# Altium PCB pcb.pcbdoc (part 3 of 6)
Units mm, origin at the board's own origin, x right, y up, seen from the top; angles counter-clockwise.
Board outline 95 x 60 mm, 4 copper layers (Top Layer, TopInt Layer, BotInt Layer, Bottom Layer), stack 1.459 mm thick; 162 components, 164 nets, 673 pads, 269 vias.
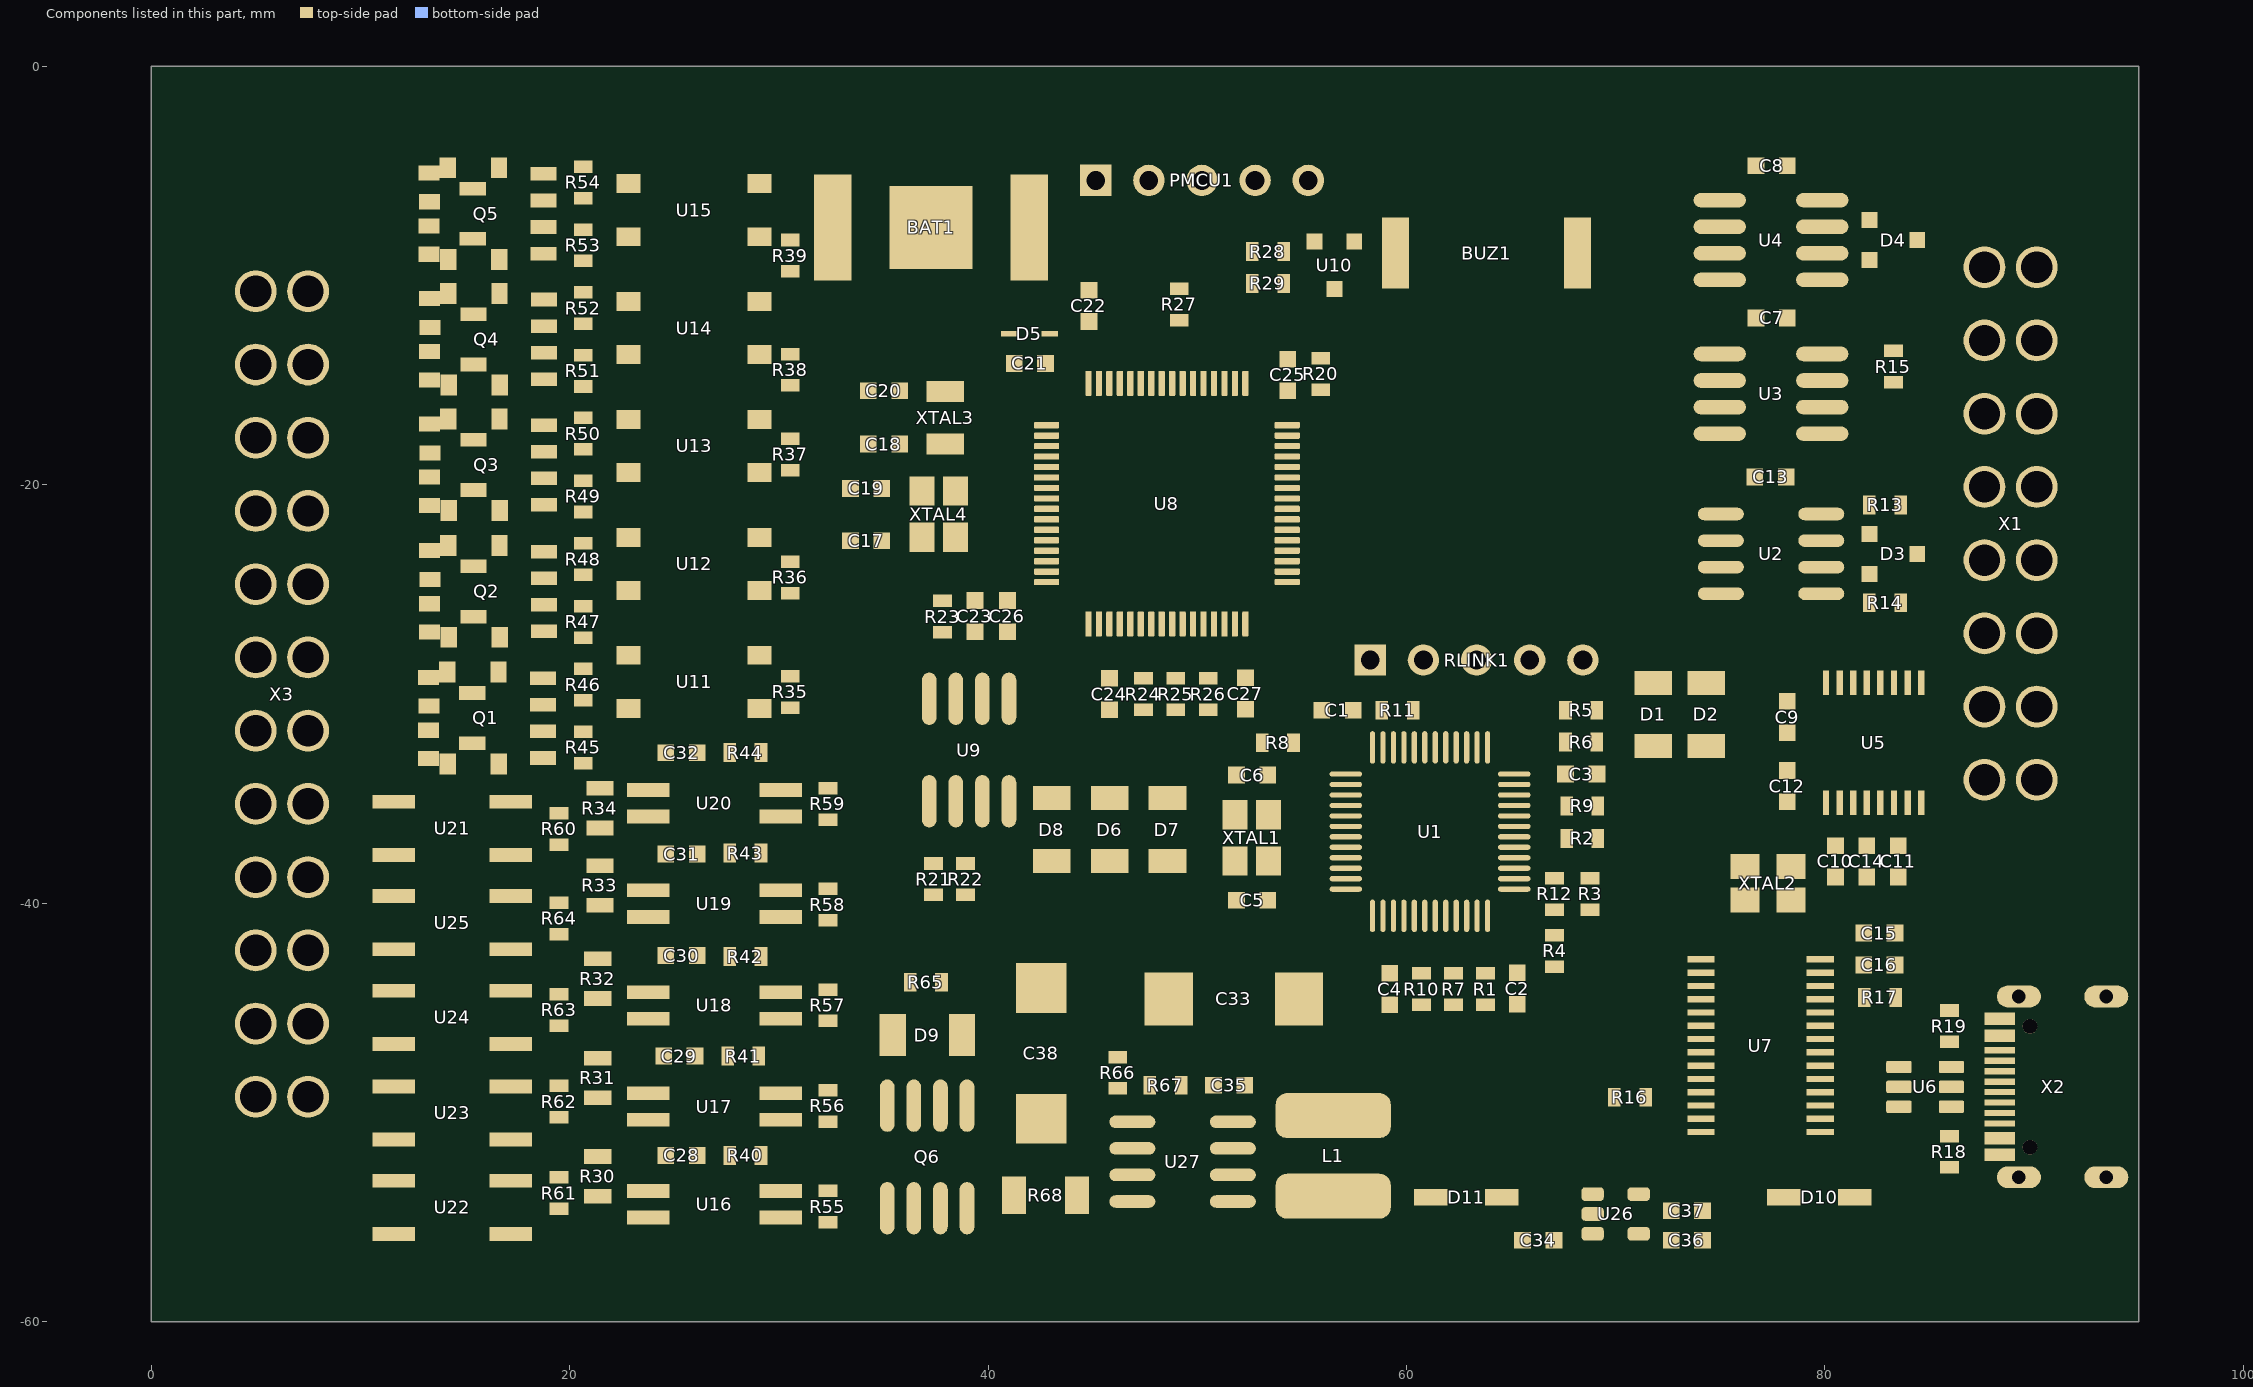
[diagram p5: the components of this part, seen from the top]

## Via types
v1: diameter 0.7, hole 0.3, Top Layer to Bottom Layer, tented both sides, 249 vias
v2: diameter 1, hole 0.5, Top Layer to Bottom Layer, tented both sides, 20 vias

## Nets (pads, with @x,y where several pads share a name; then routed paths per layer and width w, separated by ;. In a path a pad name is that pad's centre, name@x,y a point inside that pad or via, vN(x,y) a via of type N, cw(c..) or ccw(c..) an arc to the next point about the centre after c; other vN are vias at no path point) (continued)
copper on no net: (continued)
  Top Layer w0.025: 62.543,-20.277 62.746,-20.277 ; 62.543,-20.252 62.721,-20.252 ; 62.543,-20.227 62.721,-20.227 ; 62.543,-20.201 62.721,-20.201 ; 62.543,-20.176 62.696,-20.176 ; 62.569,-20.328 62.772,-20.328 ; 62.569,-20.303 62.746,-20.303 ; 62.569,-19.617 62.746,-19.617 ; 62.569,-19.592 62.746,-19.592 ; 62.569,-19.566 62.746,-19.566 ; 62.569,-19.541 62.746,-19.541 ; 62.569,-19.515 62.746,-19.515 ; 62.594,-20.379 62.848,-20.379 ; 62.594,-20.354 62.823,-20.354 ; 62.594,-19.719 62.848,-19.719 ; 62.594,-19.693 62.797,-19.693 ; 62.594,-19.668 62.772,-19.668 ; 62.594,-19.642 62.772,-19.642 ; 62.594,-19.49 62.772,-19.49 ; 62.594,-19.465 62.772,-19.465 ; 62.594,-19.439 62.797,-19.439 ; 62.594,-18.474 62.772,-18.474 ; 62.594,-18.449 62.772,-18.449 ; 62.594,-18.423 62.772,-18.423 ; 62.594,-18.398 62.772,-18.398 ; 62.594,-18.372 62.772,-18.372 ; 62.594,-18.347 62.772,-18.347 ; 62.594,-18.322 62.772,-18.322 ; 62.594,-18.296 62.772,-18.296 ; 62.594,-18.271 62.772,-18.271 ; 62.594,-18.245 62.772,-18.245 ; 62.594,-18.22 62.772,-18.22 ; 62.594,-18.195 62.772,-18.195 ; 62.594,-18.169 62.772,-18.169 ; 62.594,-18.144 62.772,-18.144 ; 62.594,-18.118 62.772,-18.118 ; 62.594,-18.093 62.772,-18.093 ; 62.594,-18.068 62.772,-18.068 ; 62.594,-18.042 62.772,-18.042 ; 62.594,-18.017 62.772,-18.017 ; 62.594,-17.991 62.772,-17.991 ; 62.594,-17.966 62.772,-17.966 ; 62.594,-17.941 62.772,-17.941 ; 62.594,-17.915 62.772,-17.915 ; 62.594,-17.89 62.772,-17.89 ; 62.594,-17.864 62.772,-17.864 ; 62.594,-17.839 62.772,-17.839 ; 62.594,-17.814 62.772,-17.814 ; 62.594,-17.788 62.772,-17.788 ; 62.594,-17.763 62.772,-17.763 ; 62.594,-17.737 62.772,-17.737 ; 62.594,-17.712 62.772,-17.712 ; 62.594,-17.687 62.772,-17.687 ; 62.594,-17.661 62.772,-17.661 ; 62.594,-17.636 62.772,-17.636 ; 62.594,-17.61 62.772,-17.61 ; 62.594,-17.585 62.772,-17.585 ; 62.594,-17.56 62.797,-17.56 ; 62.594,-17.534 62.797,-17.534 ; 62.594,-17.509 62.823,-17.509 ; 62.594,-17.483 62.848,-17.483 ; 62.594,-17.458 62.848,-17.458 ; 62.594,-17.433 62.873,-17.433 ; 62.594,-17.407 62.899,-17.407 ; 62.594,-17.382 62.95,-17.382 ; 62.594,-17.356 62.975,-17.356 ; 62.594,-17.331 62.772,-17.331 ; 62.594,-17.306 62.772,-17.306 ; 62.594,-17.28 62.772,-17.28 ; 62.594,-17.255 62.772,-17.255 ; 62.594,-17.229 62.772,-17.229 ; 62.594,-17.204 62.772,-17.204 ; 62.594,-17.179 62.772,-17.179 ; 62.594,-17.153 62.772,-17.153 ; 62.594,-17.128 62.772,-17.128 ; 62.594,-17.102 62.772,-17.102 ; 62.594,-17.077 62.772,-17.077 ; 62.594,-17.052 62.772,-17.052 ; 62.594,-17.026 62.772,-17.026 ; 62.594,-17.001 62.772,-17.001 ; 62.594,-16.975 62.772,-16.975 ; 62.594,-16.95 62.772,-16.95 ; 62.594,-16.925 62.772,-16.925 ; 62.594,-16.899 62.772,-16.899 ; 62.594,-16.874 62.772,-16.874 ; 62.594,-16.848 62.772,-16.848 ; 62.594,-16.823 62.772,-16.823 ; 62.594,-16.798 62.772,-16.798 ; 62.594,-16.772 62.772,-16.772 ; 62.594,-16.747 62.772,-16.747 ; 62.594,-16.721 62.772,-16.721 ; 62.594,-16.696 62.772,-16.696 ; 62.594,-16.671 62.772,-16.671 ; 62.594,-16.239 62.772,-16.239 ; 62.594,-16.213 62.772,-16.213 ; 62.594,-16.188 62.772,-16.188 ; 62.594,-16.163 62.772,-16.163 ; 62.594,-16.137 62.772,-16.137 ; 62.594,-16.112 62.772,-16.112 ; 62.594,-16.086 62.772,-16.086 ; 62.594,-16.061 62.772,-16.061 ; 62.594,-16.036 62.772,-16.036 ; 62.594,-16.01 62.772,-16.01 ; 62.594,-15.985 62.772,-15.985 ; 62.594,-15.959 62.772,-15.959 ; 62.594,-15.934 62.772,-15.934 ; 62.594,-15.909 62.772,-15.909 ; 62.594,-15.883 62.772,-15.883 ; 62.594,-15.858 62.772,-15.858 ; 62.594,-15.832 62.772,-15.832 ; 62.594,-15.807 62.772,-15.807 ; 62.594,-15.782 62.772,-15.782 ; 62.594,-15.756 62.772,-15.756 ; 62.594,-15.731 62.772,-15.731 ; 62.594,-15.705 62.772,-15.705 ; 62.594,-15.68 62.772,-15.68 ; 62.594,-15.655 62.772,-15.655 ; 62.594,-15.629 62.772,-15.629 ; 62.594,-15.604 62.772,-15.604 ; 62.594,-15.578 62.772,-15.578 ; 62.594,-15.553 62.772,-15.553 ; 62.594,-15.528 62.772,-15.528 ; 62.594,-15.502 62.772,-15.502 ; 62.594,-15.477 62.772,-15.477 ; 62.594,-15.451 62.772,-15.451 ; 62.594,-15.426 62.772,-15.426 ; 62.594,-15.401 62.772,-15.401 ; 62.594,-15.375 62.772,-15.375 ; 62.594,-15.35 62.772,-15.35 ; 62.594,-15.324 62.772,-15.324 ; 62.594,-15.299 62.797,-15.299 ; 62.594,-15.274 62.797,-15.274 ; 62.594,-15.248 62.823,-15.248 ; 62.594,-15.223 62.823,-15.223 ; 62.594,-15.197 62.848,-15.197 ; 62.594,-15.172 62.873,-15.172 ; 62.594,-15.147 62.899,-15.147 ; 62.594,-15.121 62.95,-15.121 ; 62.594,-15.096 63,-15.096 ; 62.594,-15.07 62.772,-15.07 ; 62.594,-15.045 62.772,-15.045 ; 62.594,-15.02 62.772,-15.02 ; 62.594,-14.994 62.772,-14.994 ; 62.594,-14.969 62.772,-14.969 ; 62.594,-14.943 62.772,-14.943 ; 62.619,-20.404 62.924,-20.404 ; 62.619,-19.744 62.899,-19.744 ; 62.619,-19.414 62.848,-19.414 ; 62.619,-19.388 62.873,-19.388 ; 62.645,-20.43 63.432,-20.43 ; 62.645,-19.769 62.95,-19.769 ; 62.645,-19.363 62.975,-19.363 ; 62.67,-20.455 63.407,-20.455 ; 62.67,-19.795 63.051,-19.795 ; 62.67,-19.338 63.432,-19.338 ; 62.696,-19.82 63.153,-19.82 ; 62.696,-19.312 63.381,-19.312 ; 62.721,-20.481 63.381,-20.481 ; 62.721,-19.846 63.229,-19.846 ; 62.746,-20.506 63.331,-20.506 ; 62.746,-19.287 63.356,-19.287 ; 62.772,-19.871 63.305,-19.871 ; 62.772,-19.261 63.305,-19.261 ; 62.797,-17.331 63.051,-17.331 ; 62.797,-15.07 63.229,-15.07 ; 62.797,-15.045 63.229,-15.045 ; 62.823,-20.531 63.28,-20.531 ; 62.823,-17.306 63.508,-17.306 ; 62.823,-15.02 63.229,-15.02 ; 62.848,-19.896 63.356,-19.896 ; 62.848,-19.236 63.229,-19.236 ; 62.848,-17.28 63.483,-17.28 ; 62.848,-14.994 63.229,-14.994 ; 62.873,-17.255 63.458,-17.255 ; 62.899,-14.969 63.229,-14.969 ; 62.924,-20.557 63.153,-20.557 ; 62.924,-19.922 63.407,-19.922 ; 62.924,-17.229 63.432,-17.229 ; 62.95,-14.943 63.229,-14.943 ; 62.975,-17.204 63.381,-17.204 ; 63.026,-19.947 63.432,-19.947 ; 63.051,-17.179 63.305,-17.179 ; 63.051,-14.918 63.153,-14.918 ; 63.102,-19.363 63.432,-19.363 ; 63.127,-19.973 63.458,-19.973 ; 63.153,-20.404 63.458,-20.404 ; 63.204,-19.998 63.483,-19.998 ; 63.204,-19.388 63.458,-19.388 ; 63.229,-20.379 63.483,-20.379 ; 63.229,-19.414 63.483,-19.414 ; 63.229,-17.331 63.534,-17.331 ; 63.254,-20.023 63.483,-20.023 ; 63.28,-20.354 63.508,-20.354 ; 63.28,-20.049 63.508,-20.049 ; 63.28,-19.439 63.483,-19.439 ; 63.305,-20.328 63.508,-20.328 ; 63.305,-20.074 63.508,-20.074 ; 63.305,-19.465 63.508,-19.465 ; 63.305,-17.356 63.534,-17.356 ; 63.305,-15.705 63.483,-15.705 ; 63.305,-15.68 63.483,-15.68 ; 63.305,-15.655 63.483,-15.655 ; 63.305,-15.629 63.483,-15.629 ; 63.305,-15.604 63.483,-15.604 ; 63.305,-15.578 63.483,-15.578 ; 63.305,-15.553 63.483,-15.553 ; 63.305,-15.528 63.483,-15.528 ; 63.305,-15.502 63.483,-15.502 ; 63.305,-15.477 63.483,-15.477 ; 63.331,-20.303 63.508,-20.303 ; 63.331,-20.1 63.534,-20.1 ; 63.331,-19.515 63.508,-19.515 ; 63.331,-19.49 63.508,-19.49 ; 63.331,-17.382 63.559,-17.382 ; 63.331,-15.832 63.508,-15.832 ; 63.331,-15.807 63.508,-15.807 ; 63.331,-15.782 63.508,-15.782 ; 63.331,-15.756 63.508,-15.756 ; 63.331,-15.731 63.483,-15.731 ; 63.331,-15.451 63.483,-15.451 ; 63.331,-15.426 63.508,-15.426 ; 63.331,-15.401 63.508,-15.401 ; 63.331,-15.375 63.508,-15.375 ; 63.331,-15.35 63.508,-15.35 ; 63.356,-20.277 63.534,-20.277 ; 63.356,-20.252 63.534,-20.252 ; 63.356,-20.227 63.534,-20.227 ; 63.356,-20.201 63.534,-20.201 ; 63.356,-20.176 63.534,-20.176 ; 63.356,-20.15 63.534,-20.15 ; 63.356,-20.125 63.534,-20.125 ; 63.356,-19.617 63.534,-19.617 ; 63.356,-19.592 63.534,-19.592 ; 63.356,-19.566 63.534,-19.566 ; 63.356,-19.541 63.534,-19.541 ; 63.356,-17.407 63.559,-17.407 ; 63.356,-15.909 63.559,-15.909 ; 63.356,-15.883 63.534,-15.883 ; 63.356,-15.858 63.534,-15.858 ; 63.356,-15.324 63.534,-15.324 ; 63.356,-15.299 63.534,-15.299 ; 63.356,-15.274 63.559,-15.274 ; 63.381,-17.458 63.559,-17.458 ; 63.381,-17.433 63.559,-17.433 ; 63.381,-15.959 63.585,-15.959 ; 63.381,-15.934 63.559,-15.934 ; 63.381,-15.248 63.585,-15.248 ; 63.381,-15.223 63.585,-15.223 ; 63.407,-17.56 63.585,-17.56 ; 63.407,-17.534 63.585,-17.534 ; 63.407,-17.509 63.585,-17.509 ; 63.407,-17.483 63.585,-17.483 ; 63.407,-16.01 63.635,-16.01 ; 63.407,-15.985 63.61,-15.985 ; 63.407,-15.197 63.61,-15.197 ; 63.407,-15.172 63.635,-15.172 ; 63.432,-18.474 63.585,-18.474 ; 63.432,-18.449 63.585,-18.449 ; 63.432,-18.423 63.585,-18.423 ; 63.432,-18.398 63.585,-18.398 ; 63.432,-18.372 63.585,-18.372 ; 63.432,-18.347 63.585,-18.347 ; 63.432,-18.322 63.585,-18.322 ; 63.432,-18.296 63.585,-18.296 ; 63.432,-18.271 63.585,-18.271 ; 63.432,-18.245 63.585,-18.245 ; 63.432,-18.22 63.585,-18.22 ; 63.432,-18.195 63.585,-18.195 ; 63.432,-18.169 63.585,-18.169 ; 63.432,-18.144 63.585,-18.144 ; 63.432,-18.118 63.585,-18.118 ; 63.432,-18.093 63.585,-18.093 ; 63.432,-18.068 63.585,-18.068 ; 63.432,-18.042 63.585,-18.042 ; 63.432,-18.017 63.585,-18.017 ; 63.432,-17.991 63.585,-17.991 ; 63.432,-17.966 63.585,-17.966 ; 63.432,-17.941 63.585,-17.941 ; 63.432,-17.915 63.585,-17.915 ; 63.432,-17.89 63.585,-17.89 ; 63.432,-17.864 63.585,-17.864 ; 63.432,-17.839 63.585,-17.839 ; 63.432,-17.814 63.585,-17.814 ; 63.432,-17.788 63.585,-17.788 ; 63.432,-17.763 63.585,-17.763 ; 63.432,-17.737 63.585,-17.737 ; 63.432,-17.712 63.585,-17.712 ; 63.432,-17.687 63.585,-17.687 ; 63.432,-17.661 63.585,-17.661 ; 63.432,-17.636 63.585,-17.636 ; 63.432,-17.61 63.585,-17.61 ; 63.432,-17.585 63.585,-17.585 ; 63.432,-16.036 63.661,-16.036 ; 63.432,-15.147 63.661,-15.147 ; 63.458,-16.086 63.737,-16.086 ; 63.458,-16.061 63.686,-16.061 ; 63.458,-15.121 63.686,-15.121 ; 63.483,-16.112 63.813,-16.112 ; 63.483,-15.096 63.737,-15.096 ; 63.508,-16.137 64.27,-16.137 ; 63.508,-15.07 63.813,-15.07 ; 63.534,-15.045 64.27,-15.045 ; 63.559,-16.163 64.245,-16.163 ; 63.559,-15.02 64.245,-15.02 ; 63.585,-16.188 64.194,-16.188 ; 63.585,-14.994 64.194,-14.994 ; 63.635,-16.213 64.169,-16.213 ; 63.635,-14.969 64.143,-14.969 ; 63.686,-16.239 64.093,-16.239 ; 63.712,-14.943 64.093,-14.943 ; 63.737,-19.947 63.915,-19.947 ; 63.737,-19.922 63.915,-19.922 ; 63.737,-19.896 63.915,-19.896 ; 63.737,-19.871 63.915,-19.871 ; 63.737,-19.846 63.915,-19.846 ; 63.737,-19.82 63.915,-19.82 ; 63.762,-20.125 63.94,-20.125 ; 63.762,-20.1 63.94,-20.1 ; 63.762,-20.074 63.94,-20.074 ; 63.762,-20.049 63.94,-20.049 ; 63.762,-20.023 63.915,-20.023 ; 63.762,-19.998 63.915,-19.998 ; 63.762,-19.973 63.915,-19.973 ; 63.762,-19.795 63.915,-19.795 ; 63.762,-19.769 63.915,-19.769 ; 63.762,-19.744 63.94,-19.744 ; 63.762,-19.719 63.94,-19.719 ; 63.762,-19.693 63.94,-19.693 ; 63.762,-19.668 63.94,-19.668 ; 63.762,-19.642 63.966,-19.642 ; 63.788,-20.201 63.991,-20.201 ; 63.788,-20.176 63.966,-20.176 ; 63.788,-20.15 63.966,-20.15 ; 63.788,-19.617 63.966,-19.617 ; 63.788,-19.592 63.991,-19.592 ; 63.813,-20.252 64.016,-20.252 ; 63.813,-20.227 63.991,-20.227 ; 63.813,-19.566 63.991,-19.566 ; 63.813,-19.541 64.016,-19.541 ; 63.813,-19.515 64.016,-19.515 ; 63.813,-16.264 63.991,-16.264 ; 63.839,-20.303 64.067,-20.303 ; 63.839,-20.277 64.042,-20.277 ; 63.839,-19.49 64.042,-19.49 ; 63.839,-14.918 63.966,-14.918 ; 63.864,-20.328 64.093,-20.328 ; 63.864,-19.465 64.067,-19.465 ; 63.864,-19.439 64.093,-19.439 ; 63.864,-18.245 64.067,-18.245 ; 63.864,-18.22 64.042,-18.22 ; 63.864,-18.195 64.042,-18.195 ; 63.864,-18.169 64.042,-18.169 ; 63.864,-18.144 64.042,-18.144 ; 63.864,-18.118 64.042,-18.118 ; 63.864,-18.093 64.042,-18.093 ; 63.864,-18.068 64.042,-18.068 ; 63.864,-18.042 64.042,-18.042 ; 63.889,-20.354 64.118,-20.354 ; 63.889,-19.414 64.143,-19.414 ; 63.889,-18.322 64.143,-18.322 ; 63.889,-18.296 64.118,-18.296 ; 63.889,-18.271 64.093,-18.271 ; 63.889,-18.017 64.067,-18.017 ; 63.889,-17.991 64.093,-17.991 ; 63.889,-17.966 64.118,-17.966 ; 63.889,-17.56 64.067,-17.56 ; 63.889,-17.534 64.067,-17.534 ; 63.889,-17.509 64.067,-17.509 ; 63.889,-17.483 64.067,-17.483 ; 63.915,-20.404 64.245,-20.404 ; 63.915,-20.379 64.169,-20.379 ; 63.915,-19.388 64.194,-19.388 ; 63.915,-18.347 64.194,-18.347 ; 63.915,-17.941 64.143,-17.941 ; 63.915,-17.458 64.093,-17.458 ; 63.915,-17.433 64.118,-17.433 ; 63.915,-17.407 64.143,-17.407 ; 63.94,-20.43 64.702,-20.43 ; 63.94,-19.363 64.27,-19.363 ; 63.94,-18.372 64.677,-18.372 ; 63.94,-17.915 64.194,-17.915 ; 63.94,-17.382 64.169,-17.382 ; 63.966,-19.338 64.702,-19.338 ; 63.966,-18.398 64.651,-18.398 ; 63.966,-17.89 64.27,-17.89 ; 63.966,-17.356 64.194,-17.356 ; 63.966,-15.07 64.296,-15.07 ; 63.991,-20.455 64.677,-20.455 ; 63.991,-19.312 64.677,-19.312 ; 63.991,-18.423 64.626,-18.423 ; 63.991,-17.864 64.397,-17.864 ; 63.991,-17.331 64.27,-17.331 ; 63.991,-16.112 64.296,-16.112 ; 64.016,-20.481 64.651,-20.481 ; 64.016,-18.449 64.575,-18.449 ; 64.016,-17.839 64.88,-17.839 ; 64.016,-17.306 64.778,-17.306 ; 64.042,-19.287 64.626,-19.287 ; 64.042,-17.814 64.88,-17.814 ; 64.042,-17.28 64.753,-17.28 ; 64.042,-15.096 64.321,-15.096 ; 64.067,-20.506 64.601,-20.506 ; 64.067,-18.474 64.524,-18.474 ; 64.067,-17.255 64.728,-17.255 ; 64.067,-16.086 64.321,-16.086 ; 64.093,-19.261 64.575,-19.261 ; 64.093,-17.788 64.88,-17.788 ; 64.093,-16.061 64.347,-16.061 ; 64.093,-15.121 64.347,-15.121 ; 64.118,-20.531 64.55,-20.531 ; 64.118,-18.499 64.448,-18.499 ; 64.118,-17.229 64.677,-17.229 ; 64.143,-19.236 64.524,-19.236 ; 64.143,-16.036 64.372,-16.036 ; 64.143,-15.147 64.372,-15.147 ; 64.169,-17.763 64.88,-17.763 ; 64.169,-17.204 64.626,-17.204 ; 64.169,-16.01 64.372,-16.01 ; 64.169,-15.172 64.372,-15.172 ; 64.194,-15.985 64.397,-15.985 ; 64.194,-15.223 64.397,-15.223 ; 64.194,-15.197 64.397,-15.197 ; 64.22,-20.557 64.423,-20.557 ; 64.22,-15.959 64.397,-15.959 ; 64.22,-15.934 64.423,-15.934 ; 64.22,-15.248 64.423,-15.248 ; 64.245,-15.909 64.423,-15.909 ; 64.245,-15.883 64.448,-15.883 ; 64.245,-15.299 64.448,-15.299 ; 64.245,-15.274 64.423,-15.274 ; 64.27,-17.179 64.524,-17.179 ; 64.27,-15.858 64.448,-15.858 ; 64.27,-15.832 64.448,-15.832 ; 64.27,-15.375 64.448,-15.375 ; 64.27,-15.35 64.448,-15.35 ; 64.27,-15.324 64.448,-15.324 ; 64.296,-17.737 64.88,-17.737 ; 64.296,-15.807 64.448,-15.807 ; 64.296,-15.782 64.474,-15.782 ; 64.296,-15.756 64.474,-15.756 ; 64.296,-15.731 64.474,-15.731 ; 64.296,-15.705 64.474,-15.705 ; 64.296,-15.477 64.474,-15.477 ; 64.296,-15.451 64.474,-15.451 ; 64.296,-15.426 64.474,-15.426 ; 64.296,-15.401 64.474,-15.401 ; 64.321,-15.68 64.474,-15.68 ; 64.321,-15.655 64.474,-15.655 ; 64.321,-15.629 64.474,-15.629 ; 64.321,-15.604 64.474,-15.604 ; 64.321,-15.578 64.474,-15.578 ; 64.321,-15.553 64.474,-15.553 ; 64.321,-15.528 64.474,-15.528 ; 64.321,-15.502 64.474,-15.502 ; 64.397,-19.363 64.728,-19.363 ; 64.423,-20.404 64.728,-20.404 ; 64.448,-18.347 64.88,-18.347 ; 64.474,-19.388 64.753,-19.388 ; 64.499,-20.379 64.753,-20.379 ; 64.499,-18.322 64.88,-18.322 ; 64.524,-19.414 64.778,-19.414 ; 64.524,-17.331 64.804,-17.331 ; 64.55,-20.354 64.778,-20.354 ; 64.55,-18.296 64.88,-18.296 ; 64.575,-20.328 64.804,-20.328 ; 64.575,-19.439 64.804,-19.439 ; 64.575,-18.271 64.88,-18.271 ; 64.575,-17.356 64.804,-17.356 ; 64.601,-20.303 64.829,-20.303 ; 64.601,-19.465 64.804,-19.465 ; 64.601,-17.382 64.829,-17.382 ; 64.626,-20.277 64.829,-20.277 ; 64.626,-19.515 64.829,-19.515 ; 64.626,-19.49 64.829,-19.49 ; 64.626,-18.245 64.88,-18.245 ; 64.651,-20.252 64.855,-20.252 ; 64.651,-20.227 64.855,-20.227 ; 64.651,-19.541 64.855,-19.541 ; 64.651,-18.22 64.88,-18.22 ; 64.651,-18.195 64.88,-18.195 ; 64.651,-17.433 64.855,-17.433 ; 64.651,-17.407 64.829,-17.407 ; 64.677,-20.201 64.855,-20.201 ; 64.677,-19.592 64.88,-19.592 ; 64.677,-19.566 64.855,-19.566 ; 64.677,-18.169 64.88,-18.169 ; 64.677,-17.483 64.855,-17.483 ; 64.677,-17.458 64.855,-17.458 ; 64.702,-20.176 64.88,-20.176 ; 64.702,-20.15 64.88,-20.15 ; 64.702,-20.125 64.88,-20.125 ; 64.702,-19.642 64.88,-19.642 ; 64.702,-19.617 64.88,-19.617 ; 64.702,-18.372 64.88,-18.372 ; 64.702,-18.144 64.88,-18.144 ; 64.702,-18.118 64.88,-18.118 ; 64.702,-18.093 64.88,-18.093 ; 64.702,-18.068 64.88,-18.068 ; 64.702,-18.042 64.88,-18.042 ; 64.702,-18.017 64.88,-18.017 ; 64.702,-17.991 64.88,-17.991 ; 64.702,-17.966 64.88,-17.966 ; 64.702,-17.941 64.88,-17.941 ; 64.702,-17.915 64.88,-17.915 ; 64.702,-17.89 64.88,-17.89 ; 64.702,-17.864 64.88,-17.864 ; 64.702,-17.712 64.88,-17.712 ; 64.702,-17.687 64.88,-17.687 ; 64.702,-17.661 64.88,-17.661 ; 64.702,-17.636 64.88,-17.636 ; 64.702,-17.61 64.88,-17.61 ; 64.702,-17.585 64.88,-17.585 ; 64.702,-17.56 64.88,-17.56 ; 64.702,-17.534 64.88,-17.534 ; 64.702,-17.509 64.88,-17.509 ; 64.728,-20.1 64.905,-20.1 ; 64.728,-20.074 64.905,-20.074 ; 64.728,-20.049 64.905,-20.049 ; 64.728,-20.023 64.905,-20.023 ; 64.728,-19.744 64.905,-19.744 ; 64.728,-19.719 64.905,-19.719 ; 64.728,-19.693 64.905,-19.693 ; 64.728,-19.668 64.905,-19.668 ; 64.728,-18.474 64.905,-18.474 ; 64.728,-18.449 64.905,-18.449 ; 64.728,-18.423 64.905,-18.423 ; 64.728,-18.398 64.905,-18.398 ; 64.753,-19.998 64.905,-19.998 ; 64.753,-19.973 64.905,-19.973 ; 64.753,-19.947 64.905,-19.947 ; 64.753,-19.922 64.905,-19.922 ; 64.753,-19.896 64.905,-19.896 ; 64.753,-19.871 64.905,-19.871 ; 64.753,-19.846 64.905,-19.846 ; 64.753,-19.82 64.905,-19.82 ; 64.753,-19.795 64.905,-19.795 ; 64.753,-19.769 64.905,-19.769 ; 64.753,-16.239 64.905,-16.239 ; 64.753,-16.213 64.905,-16.213 ; 64.753,-16.188 64.905,-16.188 ; 64.753,-16.163 64.905,-16.163 ; 64.753,-16.137 64.905,-16.137 ; 64.753,-16.112 65.185,-16.112 ; 64.753,-16.086 65.109,-16.086 ; 64.753,-16.061 65.058,-16.061 ; 64.753,-16.036 65.032,-16.036 ; 64.753,-16.01 65.007,-16.01 ; 64.753,-15.985 64.982,-15.985 ; 64.753,-15.959 64.956,-15.959 ; 64.753,-15.934 64.931,-15.934 ; 64.753,-15.909 64.931,-15.909 ; 64.753,-15.883 64.905,-15.883 ; 64.753,-15.858 64.905,-15.858 ; 64.753,-15.832 64.905,-15.832 ; 64.753,-15.807 64.905,-15.807 ; 64.753,-15.782 64.905,-15.782 ; 64.753,-15.756 64.905,-15.756 ; 64.753,-15.731 64.905,-15.731 ; 64.753,-15.705 64.905,-15.705 ; 64.753,-15.68 64.905,-15.68 ; 64.753,-15.655 64.905,-15.655 ; 64.753,-15.629 64.905,-15.629 ; 64.753,-15.604 64.905,-15.604 ; 64.753,-15.578 64.905,-15.578 ; 64.753,-15.553 64.905,-15.553 ; 64.753,-15.528 64.905,-15.528 ; 64.753,-15.502 64.905,-15.502 ; 64.753,-15.477 64.905,-15.477 ; 64.753,-15.451 64.905,-15.451 ; 64.753,-15.426 64.905,-15.426 ; 64.753,-15.401 64.905,-15.401 ; 64.753,-15.375 64.905,-15.375 ; 64.753,-15.35 64.905,-15.35 ; 64.753,-15.324 64.905,-15.324 ; 64.753,-15.299 64.931,-15.299 ; 64.753,-15.274 64.931,-15.274 ; 64.753,-15.248 64.956,-15.248 ; 64.753,-15.223 64.956,-15.223 ; 64.753,-15.197 64.982,-15.197 ; 64.753,-15.172 65.007,-15.172 ; 64.753,-15.147 65.032,-15.147 ; 64.753,-15.121 65.058,-15.121 ; 64.753,-15.096 65.109,-15.096 ; 64.753,-15.07 64.905,-15.07 ; 64.753,-15.045 64.905,-15.045 ; 64.753,-15.02 64.905,-15.02 ; 64.753,-14.994 64.905,-14.994 ; 64.753,-14.969 64.905,-14.969 ; 64.753,-14.943 64.905,-14.943 ; 64.753,-14.918 64.905,-14.918 ; 64.753,-14.893 64.905,-14.893 ; 64.753,-14.867 64.905,-14.867 ; 64.753,-14.842 64.905,-14.842 ; 64.753,-14.816 64.905,-14.816 ; 64.753,-14.791 64.905,-14.791 ; 64.753,-14.766 64.905,-14.766 ; 64.753,-14.74 64.905,-14.74 ; 64.753,-14.715 64.905,-14.715 ; 64.753,-14.689 64.905,-14.689 ; 64.753,-14.664 64.905,-14.664 ; 64.753,-14.639 64.905,-14.639 ; 64.753,-14.613 64.905,-14.613 ; 64.753,-14.588 64.905,-14.588 ; 64.753,-14.562 64.905,-14.562 ; 64.753,-14.537 64.905,-14.537 ; 64.753,-14.512 64.905,-14.512 ; 64.753,-14.461 64.905,-14.461 ; 64.753,-14.435 64.905,-14.435 ; 64.931,-16.137 65.642,-16.137 ; 64.931,-15.07 65.21,-15.07 ; 64.956,-16.163 65.617,-16.163 ; 64.956,-15.045 65.642,-15.045 ; 64.982,-15.02 65.617,-15.02 ; 65.007,-16.188 65.566,-16.188 ; 65.007,-14.994 65.566,-14.994 ; 65.032,-16.213 65.54,-16.213 ; 65.058,-14.969 65.54,-14.969 ; 65.109,-16.239 65.49,-16.239 ; 65.109,-14.943 65.464,-14.943 ; 65.21,-20.531 65.363,-20.531 ; 65.21,-20.506 65.363,-20.506 ; 65.21,-20.481 65.363,-20.481 ; 65.21,-20.455 65.363,-20.455 ; 65.21,-20.43 65.363,-20.43 ; 65.21,-20.404 65.363,-20.404 ; 65.21,-20.379 65.363,-20.379 ; 65.21,-20.354 65.363,-20.354 ; 65.21,-20.328 65.363,-20.328 ; 65.21,-20.303 65.363,-20.303 ; 65.21,-20.277 65.363,-20.277 ; 65.21,-20.252 65.363,-20.252 ; 65.21,-20.227 65.363,-20.227 ; 65.21,-20.201 65.363,-20.201 ; 65.21,-20.176 65.363,-20.176 ; 65.21,-20.15 65.363,-20.15 ; 65.21,-20.125 65.363,-20.125 ; 65.21,-20.1 65.363,-20.1 ; 65.21,-20.074 65.363,-20.074 ; 65.21,-20.049 65.363,-20.049 ; 65.21,-20.023 65.363,-20.023 ; 65.21,-19.998 65.363,-19.998 ; 65.21,-19.973 65.363,-19.973 ; 65.21,-19.947 65.363,-19.947 ; 65.21,-19.922 65.363,-19.922 ; 65.21,-19.896 65.363,-19.896 ; 65.21,-19.871 65.363,-19.871 ; 65.21,-19.846 65.363,-19.846 ; 65.21,-19.82 65.363,-19.82 ; 65.21,-19.795 65.363,-19.795 ; 65.21,-19.769 65.363,-19.769 ; 65.21,-19.744 65.363,-19.744 ; 65.21,-19.719 65.363,-19.719 ; 65.21,-19.693 65.363,-19.693 ; 65.21,-19.668 65.363,-19.668 ; 65.21,-19.642 65.363,-19.642 ; 65.21,-19.617 65.363,-19.617 ; 65.21,-19.592 65.363,-19.592 ; 65.21,-19.566 65.363,-19.566 ; 65.21,-19.541 65.363,-19.541 ; 65.21,-19.515 65.363,-19.515 ; 65.21,-19.49 65.363,-19.49 ; 65.21,-19.465 65.363,-19.465 ; 65.21,-19.439 65.363,-19.439 ; 65.21,-19.414 65.363,-19.414 ; 65.21,-19.388 65.363,-19.388 ; 65.21,-19.363 65.363,-19.363 ; 65.21,-19.338 65.363,-19.338 ; 65.21,-19.312 65.363,-19.312 ; 65.21,-19.287 65.363,-19.287 ; 65.21,-19.261 65.363,-19.261 ; 65.21,-19.236 65.363,-19.236 ; 65.21,-19.211 65.363,-19.211 ; 65.21,-19.185 65.363,-19.185 ; 65.21,-19.16 65.363,-19.16 ; 65.21,-19.134 65.363,-19.134 ; 65.21,-19.109 65.363,-19.109 ; 65.21,-19.084 65.363,-19.084 ; 65.21,-19.058 65.363,-19.058 ; 65.21,-19.033 65.363,-19.033 ; 65.21,-19.007 65.363,-19.007 ; 65.21,-18.982 65.363,-18.982 ; 65.21,-18.957 65.363,-18.957 ; 65.21,-18.931 65.363,-18.931 ; 65.21,-18.906 65.363,-18.906 ; 65.21,-18.88 65.363,-18.88 ; 65.21,-18.855 65.363,-18.855 ; 65.21,-18.83 65.363,-18.83 ; 65.21,-18.804 65.363,-18.804 ; 65.21,-18.779 65.363,-18.779 ; 65.21,-18.753 65.363,-18.753 ; 65.21,-18.728 65.363,-18.728 ; 65.21,-18.703 65.363,-18.703 ; 65.21,-16.264 65.363,-16.264 ; 65.236,-18.474 65.388,-18.474 ; 65.236,-18.449 65.388,-18.449 ; 65.236,-18.423 65.388,-18.423 ; 65.236,-18.398 65.388,-18.398 ; 65.236,-18.372 65.388,-18.372 ; 65.236,-18.347 65.388,-18.347 ; 65.236,-18.322 65.388,-18.322 ; 65.236,-18.296 65.388,-18.296 ; 65.236,-18.271 65.388,-18.271 ; 65.236,-18.245 65.388,-18.245 ; 65.236,-18.22 65.388,-18.22 ; 65.236,-18.195 65.388,-18.195 ; 65.236,-18.169 65.388,-18.169 ; 65.236,-18.144 65.388,-18.144 ; 65.236,-18.118 65.388,-18.118 ; 65.236,-18.093 65.388,-18.093 ; 65.236,-18.068 65.388,-18.068 ; 65.236,-18.042 65.388,-18.042 ; 65.236,-18.017 65.388,-18.017 ; 65.236,-17.991 65.388,-17.991 ; 65.236,-17.966 65.388,-17.966 ; 65.236,-17.941 65.388,-17.941 ; 65.236,-17.915 65.388,-17.915 ; 65.236,-17.89 65.388,-17.89 ; 65.236,-17.864 65.388,-17.864 ; 65.236,-17.839 65.388,-17.839 ; 65.236,-17.814 65.388,-17.814 ; 65.236,-17.788 65.388,-17.788 ; 65.236,-17.763 65.388,-17.763 ; 65.236,-17.737 65.388,-17.737 ; 65.236,-17.712 65.388,-17.712 ; 65.236,-17.687 65.388,-17.687 ; 65.236,-17.661 65.388,-17.661 ; 65.236,-17.636 65.388,-17.636 ; 65.236,-17.61 65.388,-17.61 ; 65.236,-17.585 65.413,-17.585 ; 65.236,-17.56 65.413,-17.56 ; 65.236,-17.534 65.413,-17.534 ; 65.236,-17.509 65.439,-17.509 ; 65.236,-17.483 65.439,-17.483 ; 65.236,-17.458 65.464,-17.458 ; 65.236,-17.433 65.49,-17.433 ; 65.236,-17.407 65.515,-17.407 ; 65.236,-17.382 65.54,-17.382 ; 65.236,-17.356 65.591,-17.356 ; 65.236,-17.331 65.388,-17.331 ; 65.236,-17.306 65.388,-17.306 ; 65.236,-17.28 65.388,-17.28 ; 65.236,-17.255 65.388,-17.255 ; 65.236,-17.229 65.388,-17.229 ; 65.236,-17.204 65.388,-17.204 ; 65.236,-14.918 65.363,-14.918 ; 65.337,-16.112 65.642,-16.112 ; 65.337,-15.07 65.642,-15.07 ; 65.413,-17.331 65.693,-17.331 ; 65.413,-17.306 65.845,-17.306 ; 65.413,-16.086 65.667,-16.086 ; 65.413,-15.096 65.667,-15.096 ; 65.439,-17.28 65.845,-17.28 ; 65.464,-17.255 65.845,-17.255 ; 65.464,-16.061 65.693,-16.061 ; 65.464,-15.121 65.693,-15.121 ; 65.49,-16.036 65.718,-16.036 ; 65.49,-15.147 65.718,-15.147 ; 65.515,-17.229 65.845,-17.229 ; 65.515,-16.01 65.718,-16.01 ; 65.515,-15.172 65.718,-15.172 ; 65.54,-17.204 65.845,-17.204 ; 65.54,-15.985 65.744,-15.985 ; 65.54,-15.959 65.744,-15.959 ; 65.54,-15.223 65.744,-15.223 ; 65.54,-15.197 65.744,-15.197 ; 65.566,-15.934 65.744,-15.934 ; 65.566,-15.909 65.769,-15.909 ; 65.566,-15.274 65.769,-15.274 ; 65.566,-15.248 65.744,-15.248 ; 65.591,-15.883 65.769,-15.883 ; 65.591,-15.858 65.769,-15.858 ; 65.591,-15.832 65.769,-15.832 ; 65.591,-15.324 65.769,-15.324 ; 65.591,-15.299 65.769,-15.299 ; 65.617,-17.179 65.845,-17.179 ; 65.617,-15.807 65.794,-15.807 ; 65.617,-15.782 65.794,-15.782 ; 65.617,-15.756 65.794,-15.756 ; 65.617,-15.731 65.794,-15.731 ; 65.617,-15.705 65.794,-15.705 ; 65.617,-15.477 65.794,-15.477 ; 65.617,-15.451 65.794,-15.451 ; 65.617,-15.426 65.794,-15.426 ; 65.617,-15.401 65.794,-15.401 ; 65.617,-15.375 65.794,-15.375 ; 65.617,-15.35 65.769,-15.35 ; 65.642,-15.68 65.794,-15.68 ; 65.642,-15.655 65.794,-15.655 ; 65.642,-15.629 65.794,-15.629 ; 65.642,-15.604 65.794,-15.604 ; 65.642,-15.578 65.794,-15.578 ; 65.642,-15.553 65.794,-15.553 ; 65.642,-15.528 65.794,-15.528 ; 65.642,-15.502 65.794,-15.502 ; 65.718,-20.227 65.921,-20.227 ; 65.718,-20.201 65.896,-20.201 ; 65.718,-20.176 65.896,-20.176 ; 65.718,-20.15 65.896,-20.15 ; 65.718,-20.125 65.896,-20.125 ; 65.718,-20.1 65.896,-20.1 ; 65.718,-20.074 65.896,-20.074 ; 65.718,-20.049 65.896,-20.049 ; 65.718,-20.023 65.896,-20.023 ; 65.718,-19.998 65.896,-19.998 ; 65.718,-19.973 65.896,-19.973 ; 65.718,-19.947 65.896,-19.947 ; 65.718,-19.922 65.896,-19.922 ; 65.718,-19.896 65.896,-19.896 ; 65.718,-19.871 65.896,-19.871 ; 65.718,-19.846 65.896,-19.846 ; 65.718,-19.82 65.896,-19.82 ; 65.718,-19.795 65.896,-19.795 ; 65.718,-19.769 65.896,-19.769 ; 65.718,-19.744 65.896,-19.744 ; 65.718,-19.719 65.896,-19.719 ; 65.718,-19.693 65.896,-19.693 ; 65.718,-19.668 65.896,-19.668 ; 65.718,-19.642 65.896,-19.642 ; 65.718,-19.617 65.896,-19.617 ; 65.718,-19.592 65.896,-19.592 ; 65.718,-19.566 65.896,-19.566 ; 65.718,-19.541 65.896,-19.541 ; 65.718,-19.515 65.896,-19.515 ; 65.718,-19.49 65.896,-19.49 ; 65.718,-19.465 65.896,-19.465 ; 65.718,-19.439 65.896,-19.439 ; 65.718,-19.414 65.896,-19.414 ; 65.718,-19.388 65.896,-19.388 ; 65.718,-19.363 65.896,-19.363 ; 65.718,-19.338 65.896,-19.338 ; 65.718,-19.312 65.896,-19.312 ; 65.718,-19.287 65.896,-19.287 ; 65.718,-19.261 65.896,-19.261 ; 65.718,-19.236 65.896,-19.236 ; 65.744,-20.303 65.947,-20.303 ; 65.744,-20.277 65.921,-20.277 ; 65.744,-20.252 65.921,-20.252 ; 65.769,-20.354 65.998,-20.354 ; 65.769,-20.328 65.972,-20.328 ; 65.769,-17.331 65.845,-17.331 ; 65.794,-20.404 66.099,-20.404 ; 65.794,-20.379 66.023,-20.379 ; 65.82,-20.43 66.531,-20.43 ; 65.845,-20.455 66.506,-20.455 ; 65.871,-20.481 66.48,-20.481 ; 65.896,-20.506 66.429,-20.506 ; 65.947,-20.531 66.379,-20.531 ; 65.972,-18.093 66.15,-18.093 ; 65.972,-18.068 66.15,-18.068 ; 65.972,-18.042 66.15,-18.042 ; 65.972,-18.017 66.15,-18.017 ; 65.972,-17.991 66.15,-17.991 ; 65.972,-17.966 66.125,-17.966 ; 65.972,-17.941 66.125,-17.941 ; 65.972,-17.915 66.125,-17.915 ; 65.972,-17.89 66.125,-17.89 ; 65.972,-17.864 66.125,-17.864 ; 65.972,-17.839 66.125,-17.839 ; 65.972,-17.814 66.125,-17.814 ; 65.972,-17.788 66.125,-17.788 ; 65.972,-17.763 66.125,-17.763 ; 65.972,-17.737 66.125,-17.737 ; 65.972,-17.712 66.15,-17.712 ; 65.972,-17.687 66.15,-17.687 ; 65.972,-17.661 66.15,-17.661 ; 65.972,-17.636 66.15,-17.636 ; 65.972,-17.61 66.15,-17.61 ; 65.972,-17.585 66.175,-17.585 ; 65.998,-18.169 66.201,-18.169 ; 65.998,-18.144 66.175,-18.144 ; 65.998,-18.118 66.175,-18.118 ; 65.998,-17.56 66.175,-17.56 ; 65.998,-17.534 66.175,-17.534 ; 65.998,-17.509 66.201,-17.509 ; 65.998,-15.629 66.175,-15.629 ; 65.998,-15.604 66.175,-15.604 ; 65.998,-15.578 66.175,-15.578 ; 65.998,-15.553 66.175,-15.553 ; 66.023,-18.22 66.226,-18.22 ; 66.023,-18.195 66.201,-18.195 ; 66.023,-17.483 66.201,-17.483 ; 66.023,-17.458 66.226,-17.458 ; 66.023,-15.832 66.226,-15.832 ; 66.023,-15.807 66.201,-15.807 ; 66.023,-15.782 66.201,-15.782 ; 66.023,-15.756 66.201,-15.756 ; 66.023,-15.731 66.175,-15.731 ; 66.023,-15.705 66.175,-15.705 ; 66.023,-15.68 66.175,-15.68 ; 66.023,-15.655 66.175,-15.655 ; 66.023,-15.528 66.175,-15.528 ; 66.023,-15.502 66.175,-15.502 ; 66.023,-15.477 66.175,-15.477 ; 66.023,-15.451 66.201,-15.451 ; 66.023,-15.426 66.201,-15.426 ; 66.023,-15.401 66.201,-15.401 ; 66.023,-15.375 66.201,-15.375 ; 66.048,-20.557 66.252,-20.557 ; 66.048,-18.271 66.252,-18.271 ; 66.048,-18.245 66.226,-18.245 ; 66.048,-17.433 66.252,-17.433 ; 66.048,-17.407 66.277,-17.407 ; 66.048,-15.909 66.252,-15.909 ; 66.048,-15.883 66.226,-15.883 ; 66.048,-15.858 66.226,-15.858 ; 66.048,-15.35 66.226,-15.35 ; 66.048,-15.324 66.226,-15.324 ; 66.048,-15.299 66.252,-15.299 ; 66.074,-18.322 66.328,-18.322 ; 66.074,-18.296 66.277,-18.296 ; 66.074,-17.382 66.302,-17.382 ; 66.074,-17.356 66.328,-17.356 ; 66.074,-15.959 66.277,-15.959 ; 66.074,-15.934 66.277,-15.934 ; 66.074,-15.274 66.252,-15.274 ; 66.074,-15.248 66.277,-15.248 ; 66.074,-15.223 66.277,-15.223 ; 66.099,-18.347 66.379,-18.347 ; 66.099,-17.331 66.404,-17.331 ; 66.099,-16.01 66.328,-16.01 ; 66.099,-15.985 66.302,-15.985 ; 66.099,-15.197 66.302,-15.197 ; 66.125,-18.372 66.836,-18.372 ; 66.125,-17.306 66.81,-17.306 ; 66.125,-16.036 66.353,-16.036 ; 66.125,-15.172 66.328,-15.172 ; 66.125,-15.147 66.353,-15.147 ; 66.15,-18.398 66.81,-18.398 ; 66.15,-17.28 66.785,-17.28 ; 66.15,-16.061 66.379,-16.061 ; 66.15,-15.121 66.404,-15.121 ; 66.175,-18.423 66.785,-18.423 ; 66.175,-17.255 66.76,-17.255 ; 66.175,-16.086 66.429,-16.086 ; 66.175,-15.096 66.429,-15.096 ; 66.201,-18.449 66.76,-18.449 ; 66.201,-16.112 66.506,-16.112 ; 66.201,-15.07 66.531,-15.07 ; 66.226,-17.229 66.734,-17.229 ; 66.226,-16.137 66.963,-16.137 ; 66.226,-15.045 66.963,-15.045 ; 66.252,-18.474 66.709,-18.474 ; 66.252,-16.163 66.937,-16.163 ; 66.252,-15.02 66.937,-15.02 ; 66.277,-20.404 66.709,-20.404 ; 66.277,-17.204 66.683,-17.204 ; 66.277,-16.188 66.912,-16.188 ; 66.302,-18.499 66.633,-18.499 ; 66.302,-14.994 66.887,-14.994 ; 66.328,-16.213 66.861,-16.213 ; 66.328,-14.969 66.861,-14.969 ; 66.353,-20.379 66.709,-20.379 ; 66.353,-17.179 66.582,-17.179 ; 66.404,-20.354 66.709,-20.354 ; 66.404,-16.239 66.785,-16.239 ; 66.404,-14.943 66.785,-14.943 ; 66.429,-20.328 66.709,-20.328 ; 66.455,-20.303 66.709,-20.303 ; 66.48,-20.277 66.709,-20.277 ; 66.506,-20.252 66.709,-20.252 ; 66.506,-20.227 66.709,-20.227 ; 66.506,-16.264 66.683,-16.264 ; 66.531,-20.201 66.709,-20.201 ; 66.531,-20.176 66.709,-20.176 ; 66.531,-14.918 66.658,-14.918 ; 66.556,-20.531 66.709,-20.531 ; 66.556,-20.506 66.709,-20.506 ; 66.556,-20.481 66.709,-20.481 ; 66.556,-20.455 66.709,-20.455 ; 66.556,-20.43 66.709,-20.43 ; 66.556,-20.15 66.709,-20.15 ; 66.556,-20.125 66.709,-20.125 ; 66.556,-20.1 66.709,-20.1 ; 66.556,-20.074 66.709,-20.074 ; 66.556,-20.049 66.709,-20.049 ; 66.556,-20.023 66.709,-20.023 ; 66.556,-19.998 66.709,-19.998 ; 66.556,-19.973 66.709,-19.973 ; 66.556,-19.947 66.709,-19.947 ; 66.556,-19.922 66.709,-19.922 ; 66.556,-19.896 66.709,-19.896 ; 66.556,-19.871 66.709,-19.871 ; 66.556,-19.846 66.709,-19.846 ; 66.556,-19.82 66.709,-19.82 ; 66.556,-19.795 66.709,-19.795 ; 66.556,-19.769 66.709,-19.769 ; 66.556,-19.744 66.709,-19.744 ; 66.556,-19.719 66.709,-19.719 ; 66.556,-19.693 66.709,-19.693 ; 66.556,-19.668 66.709,-19.668 ; 66.556,-19.642 66.709,-19.642 ; 66.556,-19.617 66.709,-19.617 ; 66.556,-19.592 66.709,-19.592 ; 66.556,-19.566 66.709,-19.566 ; 66.556,-19.541 66.709,-19.541 ; 66.556,-19.515 66.709,-19.515 ; 66.556,-19.49 66.709,-19.49 ; 66.556,-19.465 66.709,-19.465 ; 66.556,-19.439 66.709,-19.439 ; 66.556,-19.414 66.709,-19.414 ; 66.556,-19.388 66.709,-19.388 ; 66.556,-19.363 66.709,-19.363 ; 66.556,-19.338 66.709,-19.338 ; 66.556,-19.312 66.709,-19.312 ; 66.556,-19.287 66.709,-19.287 ; 66.556,-19.261 66.709,-19.261 ; 66.556,-19.236 66.709,-19.236 ; 66.607,-17.331 66.836,-17.331 ; 66.633,-18.347 67.014,-18.347 ; 66.658,-17.356 67.014,-17.356 ; 66.658,-15.07 66.988,-15.07 ; 66.683,-18.322 67.014,-18.322 ; 66.683,-16.112 66.988,-16.112 ; 66.709,-17.382 67.014,-17.382 ; 66.734,-18.296 67.014,-18.296 ; 66.734,-17.407 67.014,-17.407 ; 66.734,-15.096 67.014,-15.096 ; 66.76,-18.271 67.014,-18.271 ; 66.76,-17.433 67.014,-17.433 ; 66.76,-16.086 67.014,-16.086 ; 66.785,-18.245 67.014,-18.245 ; 66.785,-17.458 67.014,-17.458 ; 66.785,-15.121 67.039,-15.121 ; 66.81,-18.22 67.014,-18.22 ; 66.81,-18.195 67.014,-18.195 ; 66.81,-17.509 67.014,-17.509 ; 66.81,-17.483 67.014,-17.483 ; 66.81,-16.061 67.039,-16.061 ; 66.836,-18.169 67.014,-18.169 ; 66.836,-18.144 67.014,-18.144 ; 66.836,-17.56 67.014,-17.56 ; 66.836,-17.534 67.014,-17.534 ; 66.836,-16.036 67.064,-16.036 ; 66.836,-15.147 67.064,-15.147 ; 66.861,-18.474 67.014,-18.474 ; 66.861,-18.449 67.014,-18.449 ; 66.861,-18.423 67.014,-18.423 ; 66.861,-18.398 67.014,-18.398 ; 66.861,-18.372 67.014,-18.372 ; 66.861,-18.118 67.014,-18.118 ; 66.861,-18.093 67.014,-18.093 ; 66.861,-18.068 67.014,-18.068 ; 66.861,-18.042 67.014,-18.042 ; 66.861,-18.017 67.014,-18.017 ; 66.861,-17.991 67.014,-17.991 ; 66.861,-17.966 67.014,-17.966 ; 66.861,-17.941 67.014,-17.941 ; 66.861,-17.915 67.014,-17.915 ; 66.861,-17.89 67.014,-17.89 ; 66.861,-17.864 67.014,-17.864 ; 66.861,-17.839 67.014,-17.839 ; 66.861,-17.814 67.014,-17.814 ; 66.861,-17.788 67.014,-17.788 ; 66.861,-17.763 67.014,-17.763 ; 66.861,-17.737 67.014,-17.737 ; 66.861,-17.712 67.014,-17.712 ; 66.861,-17.687 67.014,-17.687 ; 66.861,-17.661 67.014,-17.661 ; 66.861,-17.636 67.014,-17.636 ; 66.861,-17.61 67.014,-17.61 ; 66.861,-17.585 67.014,-17.585 ; 66.861,-17.331 67.014,-17.331 ; 66.861,-17.306 67.014,-17.306 ; 66.861,-17.28 67.014,-17.28 ; 66.861,-17.255 67.014,-17.255 ; 66.861,-17.229 67.014,-17.229 ; 66.861,-17.204 67.014,-17.204 ; 66.861,-17.179 67.014,-17.179 ; 66.861,-17.153 67.014,-17.153 ; 66.861,-17.128 67.014,-17.128 ; 66.861,-17.102 67.014,-17.102 ; 66.861,-17.077 67.014,-17.077 ; 66.861,-17.052 67.014,-17.052 ; 66.861,-17.026 67.014,-17.026 ; 66.861,-17.001 67.014,-17.001 ; 66.861,-16.975 67.014,-16.975 ; 66.861,-16.95 67.014,-16.95 ; 66.861,-16.925 67.014,-16.925 ; 66.861,-16.899 67.014,-16.899 ; 66.861,-16.874 67.014,-16.874 ; 66.861,-16.848 67.014,-16.848 ; 66.861,-16.823 67.014,-16.823 ; 66.861,-16.798 67.014,-16.798 ; 66.861,-16.772 67.014,-16.772 ; 66.861,-16.747 67.014,-16.747 ; 66.861,-16.721 67.014,-16.721 ; 66.861,-16.696 67.014,-16.696 ; 66.861,-16.671 67.014,-16.671 ; 66.861,-16.01 67.09,-16.01 ; 66.861,-15.172 67.064,-15.172 ; 66.887,-19.363 67.572,-19.363 ; 66.887,-19.338 67.572,-19.338 ; 66.887,-19.312 67.572,-19.312 ; 66.887,-19.287 67.572,-19.287 ; 66.887,-19.261 67.572,-19.261 ; 66.887,-19.236 67.572,-19.236 ; 66.887,-15.985 67.09,-15.985 ; 66.887,-15.197 67.09,-15.197 ; 66.912,-15.959 67.115,-15.959 ; 66.912,-15.934 67.115,-15.934 ; 66.912,-15.248 67.115,-15.248 ; 66.912,-15.223 67.115,-15.223 ; 66.937,-15.909 67.115,-15.909 ; 66.937,-15.299 67.141,-15.299 ; 66.937,-15.274 67.115,-15.274 ; 66.963,-15.883 67.141,-15.883 ; 66.963,-15.858 67.141,-15.858 ; 66.963,-15.832 67.141,-15.832 ; 66.963,-15.35 67.141,-15.35 ; 66.963,-15.324 67.141,-15.324 ; 66.988,-15.807 67.166,-15.807 ; 66.988,-15.782 67.166,-15.782 ; 66.988,-15.756 67.166,-15.756 ; 66.988,-15.731 67.166,-15.731 ; 66.988,-15.451 67.166,-15.451 ; 66.988,-15.426 67.166,-15.426 ; 66.988,-15.401 67.166,-15.401 ; 66.988,-15.375 67.166,-15.375 ; 67.014,-15.705 67.166,-15.705 ; 67.014,-15.68 67.166,-15.68 ; 67.014,-15.655 67.166,-15.655 ; 67.014,-15.629 67.166,-15.629 ; 67.014,-15.604 67.166,-15.604 ; 67.014,-15.578 67.166,-15.578 ; 67.014,-15.553 67.166,-15.553 ; 67.014,-15.528 67.166,-15.528 ; 67.014,-15.502 67.166,-15.502 ; 67.014,-15.477 67.166,-15.477 ; 67.141,-20.379 67.344,-20.379 ; 67.141,-20.354 67.318,-20.354 ; 67.141,-20.328 67.318,-20.328 ; 67.141,-20.303 67.318,-20.303 ; 67.141,-20.277 67.293,-20.277 ; 67.141,-20.252 67.293,-20.252 ; 67.141,-20.227 67.293,-20.227 ; 67.141,-20.201 67.293,-20.201 ; 67.141,-20.176 67.293,-20.176 ; 67.141,-20.15 67.293,-20.15 ; 67.141,-20.125 67.293,-20.125 ; 67.141,-20.1 67.293,-20.1 ; 67.141,-20.074 67.293,-20.074 ; 67.141,-20.049 67.293,-20.049 ; 67.141,-20.023 67.293,-20.023 ; 67.141,-19.998 67.293,-19.998 ; 67.141,-19.973 67.293,-19.973 ; 67.141,-19.947 67.293,-19.947 ; 67.141,-19.922 67.293,-19.922 ; 67.141,-19.896 67.293,-19.896 ; 67.141,-19.871 67.293,-19.871 ; 67.141,-19.846 67.293,-19.846 ; 67.141,-19.82 67.293,-19.82 ; 67.141,-19.795 67.293,-19.795 ; 67.141,-19.769 67.293,-19.769 ; 67.141,-19.744 67.293,-19.744 ; 67.141,-19.719 67.293,-19.719 ; 67.141,-19.693 67.293,-19.693 ; 67.141,-19.668 67.293,-19.668 ; 67.141,-19.642 67.293,-19.642 ; 67.141,-19.617 67.293,-19.617 ; 67.141,-19.592 67.293,-19.592 ; 67.141,-19.566 67.293,-19.566 ; 67.141,-19.541 67.293,-19.541 ; 67.141,-19.515 67.293,-19.515 ; 67.141,-19.49 67.293,-19.49 ; 67.141,-19.465 67.293,-19.465 ; 67.141,-19.439 67.293,-19.439 ; 67.141,-19.414 67.293,-19.414 ; 67.141,-19.388 67.293,-19.388 ; 67.141,-19.211 67.293,-19.211 ; 67.141,-19.185 67.293,-19.185 ; 67.141,-19.16 67.293,-19.16 ; 67.141,-19.134 67.293,-19.134 ; 67.141,-19.109 67.293,-19.109 ; 67.141,-19.084 67.293,-19.084 ; 67.141,-19.058 67.293,-19.058 ; 67.141,-19.033 67.293,-19.033 ; 67.141,-19.007 67.293,-19.007 ; 67.141,-18.982 67.293,-18.982 ; 67.141,-18.957 67.293,-18.957 ; 67.141,-18.931 67.293,-18.931 ; 67.166,-20.43 67.572,-20.43 ; 67.166,-20.404 67.395,-20.404 ; 67.191,-20.481 67.572,-20.481 ; 67.191,-20.455 67.572,-20.455 ; 67.217,-20.506 67.598,-20.506 ; 67.242,-17.204 67.42,-17.204 ; 67.268,-20.531 67.598,-20.531 ; 67.268,-17.306 67.445,-17.306 ; 67.268,-17.28 67.445,-17.28 ; 67.268,-17.255 67.445,-17.255 ; 67.268,-17.229 67.445,-17.229 ; 67.293,-17.382 67.471,-17.382 ; 67.293,-17.356 67.471,-17.356 ; 67.293,-17.331 67.471,-17.331 ; 67.293,-15.07 67.953,-15.07 ; 67.293,-15.045 67.953,-15.045 ; 67.293,-15.02 67.953,-15.02 ; 67.293,-14.994 67.953,-14.994 ; 67.293,-14.969 67.953,-14.969 ; 67.293,-14.943 67.953,-14.943 ; 67.318,-17.483 67.496,-17.483 ; 67.318,-17.458 67.496,-17.458 ; 67.318,-17.433 67.496,-17.433 ; 67.318,-17.407 67.471,-17.407 ; 67.344,-20.557 67.522,-20.557 ; 67.344,-17.56 67.522,-17.56 ; 67.344,-17.534 67.522,-17.534 ; 67.344,-17.509 67.522,-17.509 ; 67.369,-17.661 67.547,-17.661 ; 67.369,-17.636 67.547,-17.636 ; 67.369,-17.61 67.547,-17.61 ; 67.369,-17.585 67.522,-17.585 ; 67.395,-17.737 67.572,-17.737 ; 67.395,-17.712 67.572,-17.712 ; 67.395,-17.687 67.547,-17.687 ; 67.42,-17.839 67.598,-17.839 ; 67.42,-17.814 67.598,-17.814 ; 67.42,-17.788 67.598,-17.788 ; 67.42,-17.763 67.572,-17.763 ; 67.445,-17.915 67.623,-17.915 ; 67.445,-17.89 67.623,-17.89 ; 67.445,-17.864 67.598,-17.864 ; 67.471,-17.991 67.649,-17.991 ; 67.471,-17.966 67.623,-17.966 ; 67.471,-17.941 67.623,-17.941 ; 67.496,-18.093 67.674,-18.093 ; 67.496,-18.068 67.674,-18.068 ; 67.496,-18.042 67.649,-18.042 ; 67.496,-18.017 67.649,-18.017 ; 67.522,-18.169 67.699,-18.169 ; 67.522,-18.144 67.674,-18.144 ; 67.522,-18.118 67.674,-18.118 ; 67.522,-16.061 67.725,-16.061 ; 67.522,-16.036 67.699,-16.036 ; 67.522,-16.01 67.699,-16.01 ; 67.522,-15.985 67.699,-15.985 ; 67.522,-15.959 67.699,-15.959 ; 67.522,-15.934 67.699,-15.934 ; 67.522,-15.909 67.699,-15.909 ; 67.522,-15.883 67.699,-15.883 ; 67.522,-15.858 67.699,-15.858 ; 67.522,-15.832 67.699,-15.832 ; 67.522,-15.807 67.699,-15.807 ; 67.522,-15.782 67.699,-15.782 ; 67.522,-15.756 67.699,-15.756 ; 67.522,-15.731 67.699,-15.731 ; 67.522,-15.705 67.699,-15.705 ; 67.522,-15.68 67.699,-15.68 ; 67.522,-15.655 67.699,-15.655 ; 67.522,-15.629 67.699,-15.629 ; 67.522,-15.604 67.699,-15.604 ; 67.522,-15.578 67.699,-15.578 ; 67.522,-15.553 67.699,-15.553 ; 67.522,-15.528 67.699,-15.528 ; 67.522,-15.502 67.699,-15.502 ; 67.522,-15.477 67.699,-15.477 ; 67.522,-15.451 67.699,-15.451 ; 67.522,-15.426 67.699,-15.426 ; 67.522,-15.401 67.699,-15.401 ; 67.522,-15.375 67.699,-15.375 ; 67.522,-15.35 67.699,-15.35 ; 67.522,-15.324 67.699,-15.324 ; 67.522,-15.299 67.699,-15.299 ; 67.522,-15.274 67.699,-15.274 ; 67.522,-15.248 67.699,-15.248 ; 67.522,-15.223 67.699,-15.223 ; 67.522,-15.197 67.699,-15.197 ; 67.522,-15.172 67.699,-15.172 ; 67.522,-15.147 67.699,-15.147 ; 67.522,-15.121 67.699,-15.121 ; 67.522,-15.096 67.699,-15.096 ; 67.522,-14.918 67.699,-14.918 ; 67.522,-14.893 67.699,-14.893 ; 67.522,-14.867 67.699,-14.867 ; 67.522,-14.842 67.699,-14.842 ; 67.522,-14.816 67.699,-14.816 ; 67.522,-14.791 67.699,-14.791 ; 67.522,-14.766 67.699,-14.766 ; 67.522,-14.74 67.699,-14.74 ; 67.522,-14.715 67.699,-14.715 ; 67.522,-14.689 67.699,-14.689 ; 67.522,-14.664 67.699,-14.664 ; 67.522,-14.639 67.699,-14.639 ; 67.522,-14.613 67.699,-14.613 ; 67.547,-20.404 67.572,-20.404 ; 67.547,-18.271 67.852,-18.271 ; 67.547,-18.245 67.852,-18.245 ; 67.547,-18.22 67.852,-18.22 ; 67.547,-18.195 67.877,-18.195 ; 67.547,-16.137 67.979,-16.137 ; 67.547,-16.112 67.801,-16.112 ; 67.547,-16.086 67.75,-16.086 ; 67.572,-18.347 67.826,-18.347 ; 67.572,-18.322 67.826,-18.322 ; 67.572,-18.296 67.826,-18.296 ; 67.572,-16.163 67.979,-16.163 ; 67.598,-18.449 67.776,-18.449 ; 67.598,-18.423 67.801,-18.423 ; 67.598,-18.398 67.801,-18.398 ; 67.598,-18.372 67.801,-18.372 ; 67.598,-16.188 67.979,-16.188 ; 67.623,-18.474 67.776,-18.474 ; 67.623,-16.213 67.979,-16.213 ; 67.649,-16.239 67.979,-16.239 ; 67.725,-18.169 67.877,-18.169 ; 67.725,-18.144 67.877,-18.144 ; 67.725,-18.118 67.877,-18.118 ; 67.75,-18.093 67.903,-18.093 ; 67.75,-18.068 67.903,-18.068 ; 67.75,-18.042 67.903,-18.042 ; 67.75,-16.264 67.903,-16.264 ; 67.776,-18.017 67.928,-18.017 ; 67.776,-17.991 67.928,-17.991 ; 67.776,-17.966 67.928,-17.966 ; 67.801,-17.941 67.953,-17.941 ; 67.801,-17.915 67.953,-17.915 ; 67.801,-17.89 67.953,-17.89 ; 67.801,-17.864 67.979,-17.864 ; 67.826,-18.931 68.03,-18.931 ; 67.826,-18.906 68.03,-18.906 ; 67.826,-18.88 68.055,-18.88 ; 67.826,-18.855 68.055,-18.855 ; 67.826,-18.83 68.03,-18.83 ; 67.826,-17.839 67.979,-17.839 ; 67.826,-17.814 67.979,-17.814 ; 67.826,-17.788 68.004,-17.788 ; 67.852,-20.531 68.004,-20.531 ; 67.852,-20.506 68.004,-20.506 ; 67.852,-20.481 68.004,-20.481 ; 67.852,-20.455 68.004,-20.455 ; 67.852,-20.43 68.004,-20.43 ; 67.852,-20.404 68.004,-20.404 ; 67.852,-20.379 68.004,-20.379 ; 67.852,-20.354 68.004,-20.354 ; 67.852,-20.328 68.004,-20.328 ; 67.852,-20.303 68.004,-20.303 ; 67.852,-20.277 68.004,-20.277 ; 67.852,-20.252 68.004,-20.252 ; 67.852,-20.227 68.004,-20.227 ; 67.852,-20.201 68.004,-20.201 ; 67.852,-20.176 68.004,-20.176 ; 67.852,-20.15 68.004,-20.15 ; 67.852,-20.125 68.004,-20.125 ; 67.852,-20.1 68.004,-20.1 ; 67.852,-20.074 68.004,-20.074 ; 67.852,-20.049 68.004,-20.049 ; 67.852,-20.023 68.004,-20.023 ; 67.852,-19.998 68.004,-19.998 ; 67.852,-19.973 68.004,-19.973 ; 67.852,-19.947 68.004,-19.947 ; 67.852,-19.922 68.004,-19.922 ; 67.852,-19.896 68.004,-19.896 ; 67.852,-19.871 68.004,-19.871 ; 67.852,-19.846 68.004,-19.846 ; 67.852,-19.82 68.004,-19.82 ; 67.852,-19.795 68.004,-19.795 ; 67.852,-19.769 68.004,-19.769 ; 67.852,-19.744 68.004,-19.744 ; 67.852,-19.719 68.004,-19.719 ; 67.852,-19.693 68.004,-19.693 ; 67.852,-19.668 68.004,-19.668 ; 67.852,-19.642 68.004,-19.642 ; 67.852,-19.617 68.004,-19.617 ; 67.852,-19.592 68.004,-19.592 ; 67.852,-19.566 68.004,-19.566 ; 67.852,-19.541 68.004,-19.541 ; 67.852,-19.515 68.004,-19.515 ; 67.852,-19.49 68.004,-19.49 ; 67.852,-19.465 68.004,-19.465 ; 67.852,-19.439 68.004,-19.439 ; 67.852,-19.414 68.004,-19.414 ; 67.852,-19.388 68.004,-19.388 ; 67.852,-19.363 68.004,-19.363 ; 67.852,-19.338 68.004,-19.338 ; 67.852,-19.312 68.004,-19.312 ; 67.852,-19.287 68.004,-19.287 ; 67.852,-19.261 68.004,-19.261 ; 67.852,-19.236 68.004,-19.236 ; 67.852,-18.957 68.03,-18.957 ; 67.852,-18.804 68.03,-18.804 ; 67.852,-17.763 68.004,-17.763 ; 67.852,-17.737 68.004,-17.737 ; 67.852,-17.712 68.03,-17.712 ; 67.877,-18.779 67.979,-18.779 ; 67.877,-17.687 68.03,-17.687 ; 67.877,-17.661 68.03,-17.661 ; 67.877,-17.636 68.055,-17.636 ; 67.903,-18.982 67.979,-18.982 ; 67.903,-17.61 68.055,-17.61 ; 67.903,-17.585 68.055,-17.585 ; 67.903,-17.56 68.055,-17.56 ; 67.903,-16.112 67.979,-16.112 ; 67.928,-17.534 68.08,-17.534 ; 67.928,-17.509 68.08,-17.509 ; 67.928,-17.483 68.08,-17.483 ; 67.953,-17.458 68.258,-17.458 ; 67.953,-17.433 68.258,-17.433 ; 67.953,-17.407 68.233,-17.407 ; 67.953,-17.382 68.233,-17.382 ; 67.979,-17.356 68.233,-17.356 ; 67.979,-17.331 68.207,-17.331 ; 67.979,-17.306 68.207,-17.306 ; 68.004,-17.28 68.207,-17.28 ; 68.004,-17.255 68.182,-17.255 ; 68.004,-17.229 68.182,-17.229 ; 68.03,-17.204 68.182,-17.204 ; 68.106,-17.534 68.284,-17.534 ; 68.106,-17.509 68.258,-17.509 ; 68.106,-17.483 68.258,-17.483 ; 68.131,-17.61 68.309,-17.61 ; 68.131,-17.585 68.284,-17.585 ; 68.131,-17.56 68.284,-17.56 ; 68.157,-17.687 68.334,-17.687 ; 68.157,-17.661 68.309,-17.661 ; 68.157,-17.636 68.309,-17.636 ; 68.182,-17.763 68.36,-17.763 ; 68.182,-17.737 68.334,-17.737 ; 68.182,-17.712 68.334,-17.712 ; 68.207,-17.839 68.385,-17.839 ; 68.207,-17.814 68.36,-17.814 ; 68.207,-17.788 68.36,-17.788 ; 68.207,-14.613 68.436,-14.613 ; 68.207,-14.588 68.436,-14.588 ; 68.207,-14.562 68.436,-14.562 ; 68.207,-14.537 68.436,-14.537 ; 68.233,-17.941 68.411,-17.941 ; 68.233,-17.915 68.385,-17.915 ; 68.233,-17.89 68.385,-17.89 ; 68.233,-17.864 68.385,-17.864 ; 68.233,-16.239 68.411,-16.239 ; 68.233,-16.213 68.411,-16.213 ; 68.233,-16.188 68.411,-16.188 ; 68.233,-16.163 68.411,-16.163 ; 68.233,-16.137 68.411,-16.137 ; 68.233,-16.112 68.411,-16.112 ; 68.233,-16.086 68.411,-16.086 ; 68.233,-16.061 68.411,-16.061 ; 68.233,-16.036 68.411,-16.036 ; 68.233,-16.01 68.411,-16.01 ; 68.233,-15.985 68.411,-15.985 ; 68.233,-15.959 68.411,-15.959 ; 68.233,-15.934 68.411,-15.934 ; 68.233,-15.909 68.411,-15.909 ; 68.233,-15.883 68.411,-15.883 ; 68.233,-15.858 68.411,-15.858 ; 68.233,-15.832 68.411,-15.832 ; 68.233,-15.807 68.411,-15.807 ; 68.233,-15.782 68.411,-15.782 ; 68.233,-15.756 68.411,-15.756 ; 68.233,-15.731 68.411,-15.731 ; 68.233,-15.705 68.411,-15.705 ; 68.233,-15.68 68.411,-15.68 ; 68.233,-15.655 68.411,-15.655 ; 68.233,-15.629 68.411,-15.629 ; 68.233,-15.604 68.411,-15.604 ; 68.233,-15.578 68.411,-15.578 ; 68.233,-15.553 68.411,-15.553 ; 68.233,-15.528 68.411,-15.528 ; 68.233,-15.502 68.411,-15.502 ; 68.233,-15.477 68.411,-15.477 ; 68.233,-15.451 68.411,-15.451 ; 68.233,-15.426 68.411,-15.426 ; 68.233,-15.401 68.411,-15.401 ; 68.233,-15.375 68.411,-15.375 ; 68.233,-15.35 68.411,-15.35 ; 68.233,-15.324 68.411,-15.324 ; 68.233,-15.299 68.411,-15.299 ; 68.233,-15.274 68.411,-15.274 ; 68.233,-15.248 68.411,-15.248 ; 68.233,-15.223 68.411,-15.223 ; 68.233,-15.197 68.411,-15.197 ; 68.233,-15.172 68.411,-15.172 ; 68.233,-15.147 68.411,-15.147 ; 68.233,-15.121 68.411,-15.121 ; 68.233,-15.096 68.411,-15.096 ; 68.233,-15.07 68.411,-15.07 ; 68.233,-15.045 68.411,-15.045 ; 68.233,-15.02 68.411,-15.02 ; 68.233,-14.994 68.411,-14.994 ; 68.233,-14.969 68.411,-14.969 ; 68.233,-14.943 68.411,-14.943 ; 68.233,-14.664 68.411,-14.664 ; 68.233,-14.639 68.436,-14.639 ; 68.233,-14.512 68.411,-14.512 ; 68.258,-18.017 68.436,-18.017 ; 68.258,-17.991 68.411,-17.991 ; 68.258,-17.966 68.411,-17.966 ; 68.258,-14.486 68.385,-14.486 ; 68.284,-19.947 68.461,-19.947 ; 68.284,-19.922 68.461,-19.922 ; 68.284,-19.896 68.461,-19.896 ; 68.284,-19.871 68.461,-19.871 ; 68.284,-19.846 68.461,-19.846 ; 68.284,-19.82 68.461,-19.82 ; 68.284,-18.093 68.461,-18.093 ; 68.284,-18.068 68.436,-18.068 ; 68.284,-18.042 68.436,-18.042 ; 68.284,-14.689 68.36,-14.689 ; 68.309,-20.125 68.512,-20.125 ; 68.309,-20.1 68.487,-20.1 ; 68.309,-20.074 68.487,-20.074 ; 68.309,-20.049 68.487,-20.049 ; 68.309,-20.023 68.461,-20.023 ; 68.309,-19.998 68.461,-19.998 ; 68.309,-19.973 68.461,-19.973 ; 68.309,-19.795 68.461,-19.795 ; 68.309,-19.769 68.461,-19.769 ; 68.309,-19.744 68.487,-19.744 ; 68.309,-19.719 68.487,-19.719 ; 68.309,-19.693 68.487,-19.693 ; 68.309,-19.668 68.487,-19.668 ; 68.309,-18.169 68.487,-18.169 ; 68.309,-18.144 68.461,-18.144 ; 68.309,-18.118 68.461,-18.118 ; 68.334,-20.201 68.538,-20.201 ; 68.334,-20.176 68.512,-20.176